# Altium PCB 48V to BOB.PcbDoc
Units mm, origin at the board's own origin, x right, y up, seen from the top; angles counter-clockwise.
Board outline 50.79 x 27.94 mm, 4 copper layers (Top Side, Inner Layer 1, Inner Layer 2, Bottom Side), stack 1.59 mm thick; 11 components, 20 nets, 54 pads, 11 vias.
Unrouted connection lines stored in the file: 2.
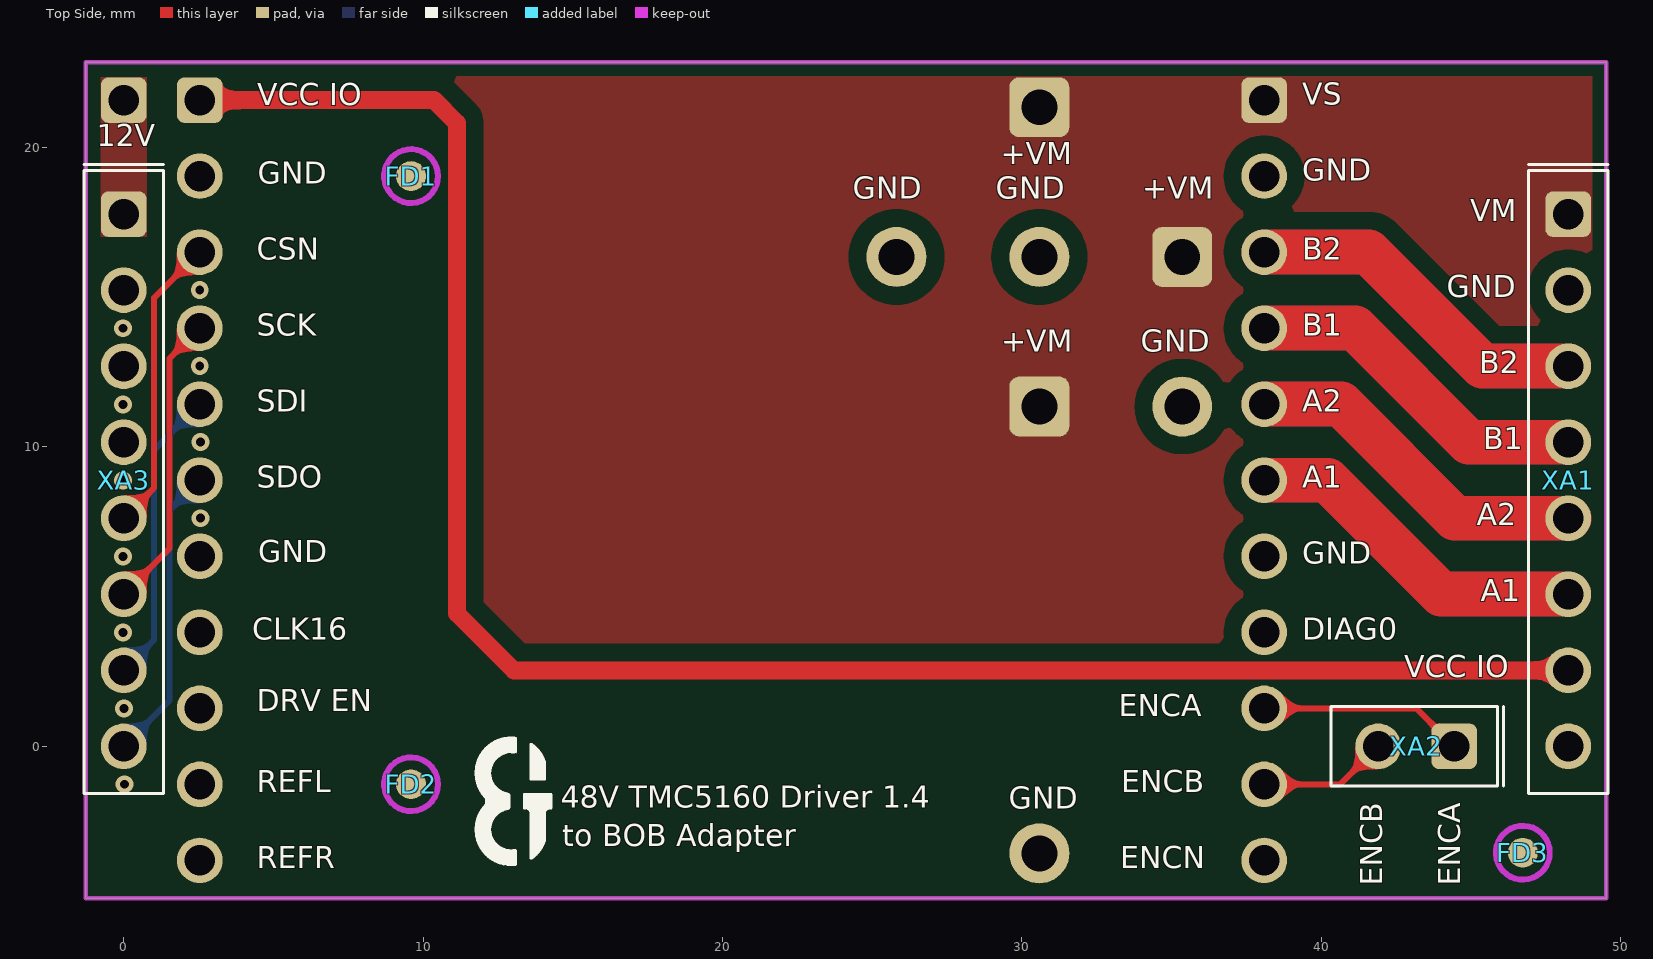
[diagram p0: Top Side view]
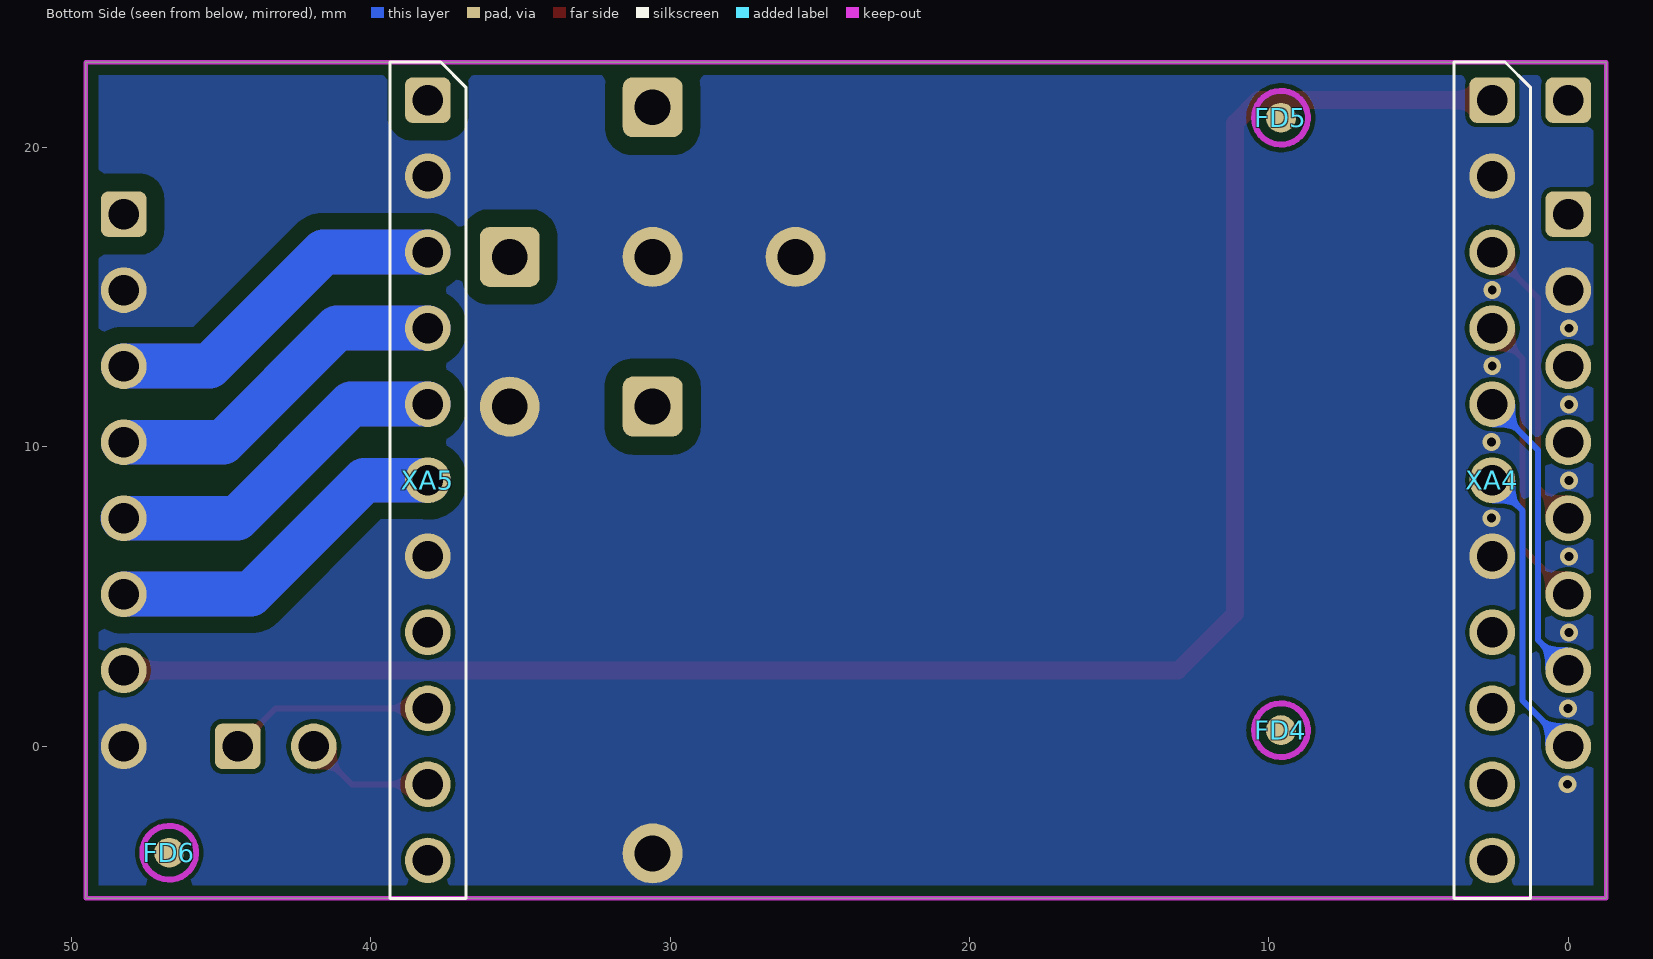
[diagram p1: Bottom Side view, seen from below]
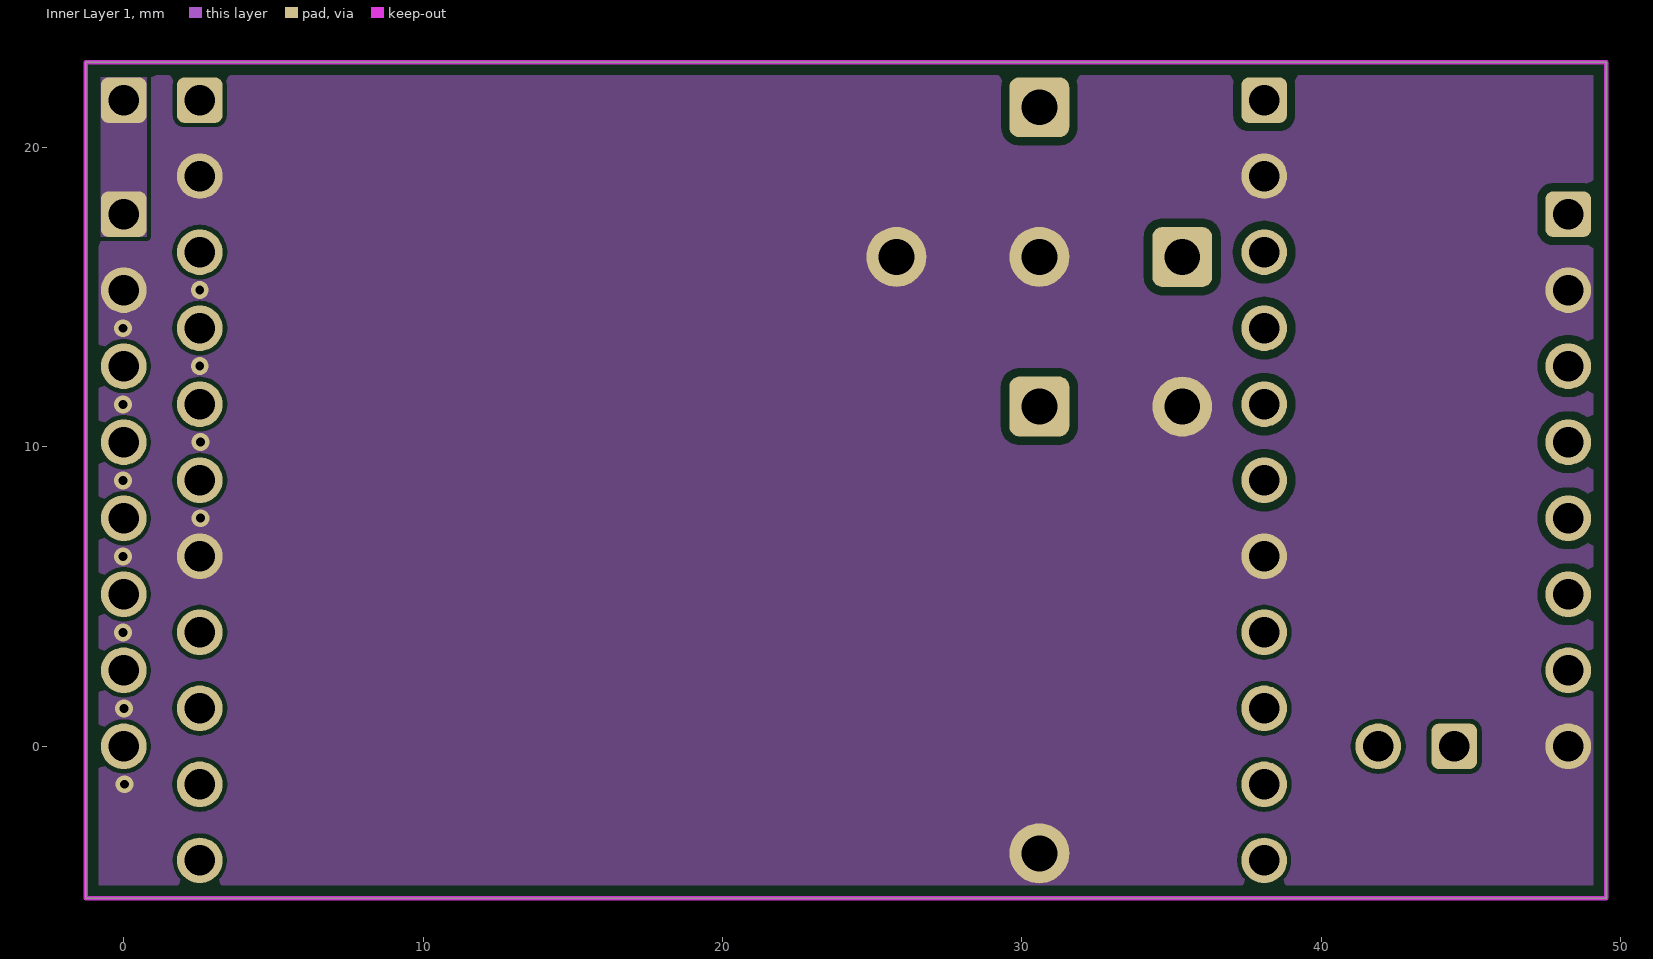
[diagram p2: Inner Layer 1]
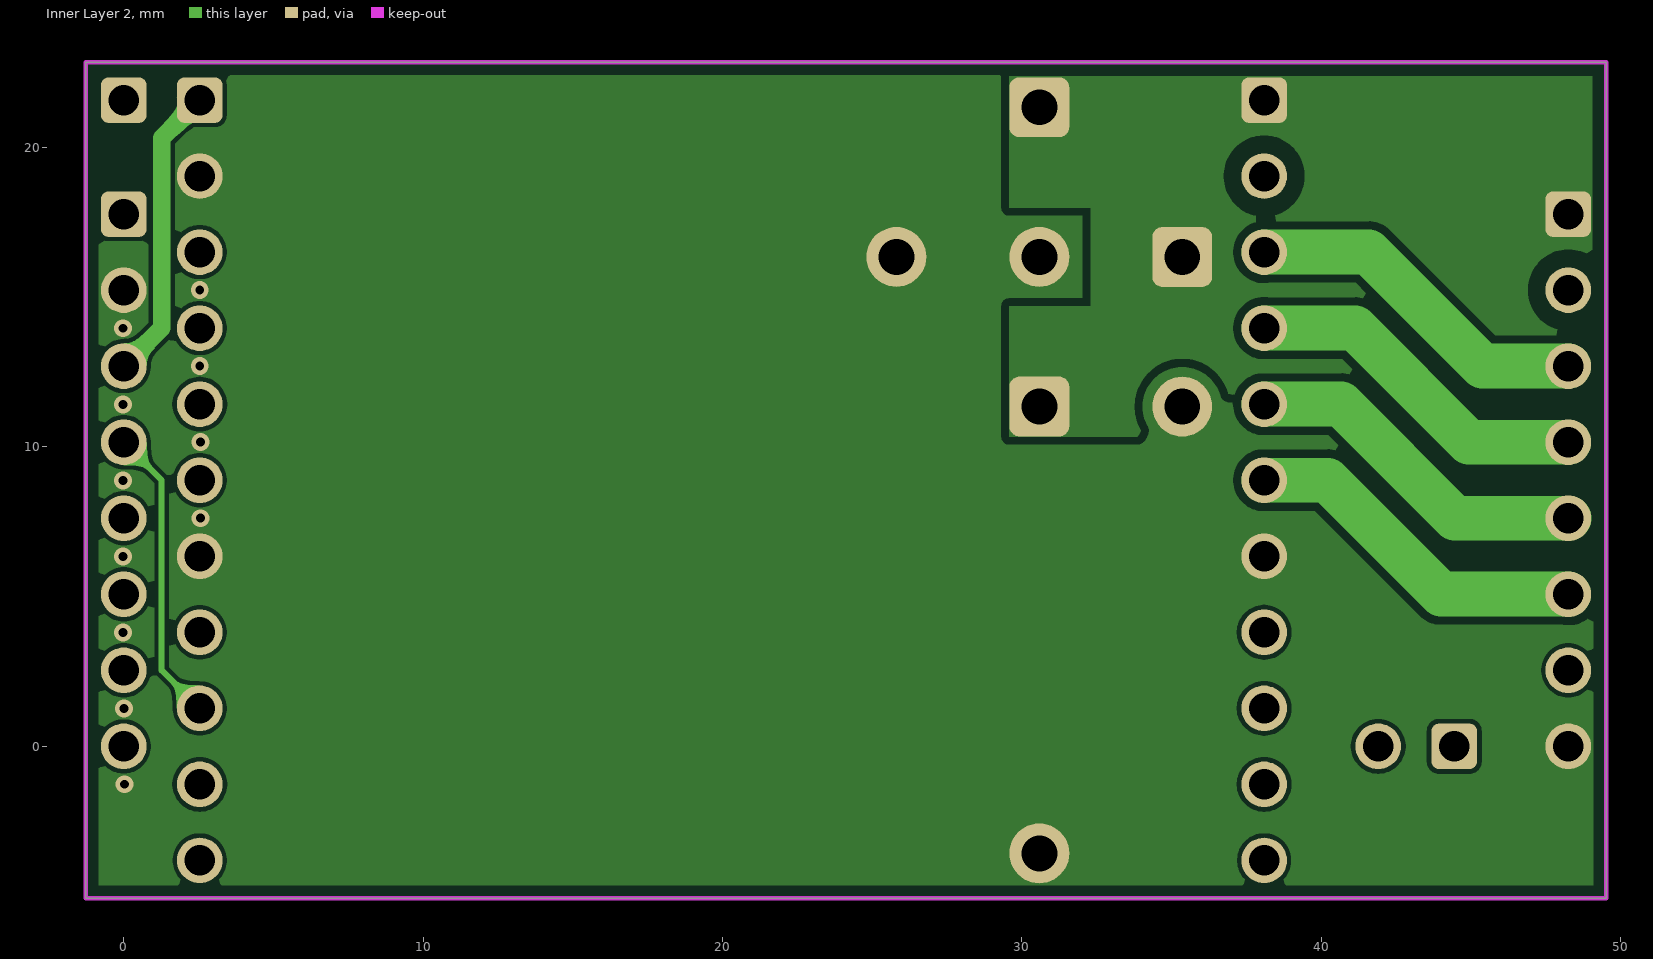
[diagram p3: Inner Layer 2]
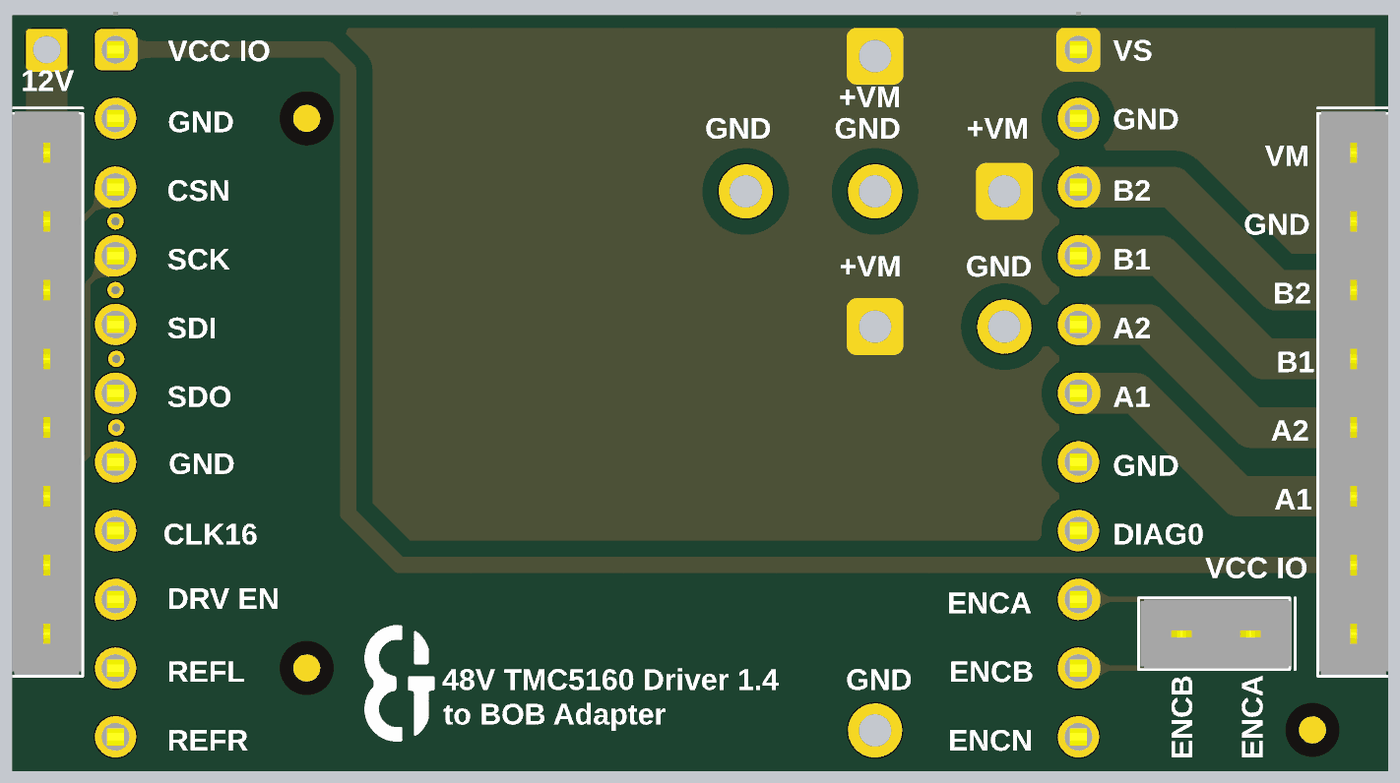
[diagram p4: 3D render of the assembled board from above, using the file's embedded part models]

## Layer stack, top to bottom
Top Solder: solder mask 0.015, WE-SM-0001, Dk 3.5
Top Side: signal copper 0.035
Dielectric 1: prepreg 0.37, WE-PP-0013, Dk 4.5
Inner Layer 1: signal copper 0.035
Core 1: core 0.71, WE-CO-0014, Dk 4.7
Inner Layer 2: signal copper 0.035
Dielectric 2: prepreg 0.37, WE-PP-0013, Dk 4.5
Bottom Side: signal copper 0.035
Bottom Solder: solder mask 0.015, WE-SM-0001, Dk 3.5

## Board outline
-1.264,-5.08 -1.264,22.86 49.53,22.86 49.53,-5.08

## Design rules (kind name [scope] priority, off if disabled: settings)
AssemblyTestpoint [All] p1: testpointundercomponent=TRUE minsize=0.8 maxsize=2.5 preferedsize=1 minholesize=0 maxholesize=0.5 preferedholesize=0.3 testpointgrid=0.025 usegrid=TRUE gridtolerance=0 allowsidetop=TRUE allowsidebottom=TRUE minspacing=2.5 compbodyclearance=0.3
BoardOutlineClearance BoardOutlineClearance_SilkTop [OnTopSilkscreen] p1: gap=0.2 ignorepadtopadclearanceinfootprint=FALSE
BoardOutlineClearance [not (OnBottomSilkscreen or OnTopSilkscreen)] p2: gap=0.425 ignorepadtopadclearanceinfootprint=FALSE
Clearance "48V and Motor Internal" [(InNetClass('48V') or InNetClass('Motor')) vs (OnLayer('Inner Layer 1') or OnLayer('Inner Layer 2'))] p1: gap=0.28 ignorepadtopadclearanceinfootprint=FALSE // for 48V, + 0.1mm marging , PD1, According IEC 60664-1:2020 Table F.5
Clearance "48V and Motor to BoardEdge" [(InNetClass('48V') or InNetClass('Motor')) vs IsKeepOut] p2: gap=0.4 ignorepadtopadclearanceinfootprint=FALSE // half Clearance for 48V+ 0.1mm marging , PD2, According IEC 60664-1:2020 Table F.5
Clearance 48V [InNetClass('48V')] p3: gap=0.6 ignorepadtopadclearanceinfootprint=FALSE // for 48V, PD2, According IEC 60664-1:2020 Table F.5
Clearance MotorPhase [InNetClass('Motor')] p4: gap=0.56 ignorepadtopadclearanceinfootprint=FALSE // Motor Phase Voltages to all other (48/1.41=34V), PD2, According IEC 60664-1:2020 Table F.5
Clearance General [All] p5: gap=0.15 ignorepadtopadclearanceinfootprint=FALSE except(0.3: Arc-Hole Track-Hole SMDPad-Hole THPad-Hole Via-Hole Fill-Hole Poly-Hole Region-Hole Text-Hole)
Clearance BoardEdge [All vs OnLayer('Keep-Out Layer')] p6: gap=0.5 ignorepadtopadclearanceinfootprint=FALSE // Clearance Copper to Board Edge
ComponentClearance TP2OTHERS_10_bot [HasFootprint('13_TP_0-8mm') OR HasFootprint('13_TP_0-8_0-3mm') vs (ObjectKind = 'Component') And OnBottomLayer And (AsMM(Height) > 10)] p1: gap=5 collisioncheckmode=3 verticalgap=50 showdistances=FALSE // Für Testpunkte auf Bottom, für Top Rule ändern (beide gehen nicht wegen TH Testpunkt)
ComponentClearance TP2OTHERS_3.5_bot [HasFootprint('13_TP_0-8mm') OR HasFootprint('13_TP_0-8_0-3mm') vs (ObjectKind = 'Component') And OnBottomLayer And (AsMM(Height) > 3.5)] p2: gap=2.5 collisioncheckmode=3 verticalgap=50 showdistances=FALSE // Für Testpunkte auf Bottom, für Top Rule ändern (beide gehen nicht wegen TH Testpunkt)
ComponentClearance TP2OTHERS_0.3_bot [HasFootprint('13_TP_0-8mm') OR HasFootprint('13_TP_0-8_0-3mm') vs (ObjectKind = 'Component') And OnBottomLayer And (AsMM(Height) < 3.5)] p3: gap=0.3 collisioncheckmode=3 verticalgap=50 showdistances=FALSE // Für Testpunkte auf Bottom, für Top Rule ändern (beide gehen nicht wegen TH Testpunkt)
ComponentClearance "PCB Header" [InComponent('XA1') vs InComponent('XA2')] p4: gap=0 collisioncheckmode=3 verticalgap=0.4 showdistances=FALSE
ComponentClearance Minimal [All] p5: gap=0.4 collisioncheckmode=3 verticalgap=0.4 showdistances=FALSE // Kann bei feinen SMD Strukturen von 0.4 auf 0.25mm reduziert werden
Creepage "Creepage VM" [InNetClass('48V') and OnBottomLayer] p1: checkdistance=0.6 ignoreinternallayers=FALSE // VM to all other, According IEC 60664-1:2020 Table F.5
Creepage "Creepage MotorVoltagetoMotorVoltage" [InNetClass('Motor') and OnBottomLayer] p2: checkdistance=0.56 // According IEC 60664-1:2020 Table F.5
FabricationTestpoint [All] p1: side=3 testpointundercomponent=TRUE minsize=0.8 maxsize=2.5 preferedsize=1 minholesize=0 maxholesize=0.5 preferedholesize=0.3 testpointgrid=0.025 allowsidetop=TRUE allowsidebottom=TRUE usegrid=TRUE gridtolerance=0 minspacing=2.5 compbodyclearance=0.3 boardedgeclearance=0.5
Height "Height BOTTOM" [OnLayer('Bottom Layer')] p1: minheight=0 maxheight=10 prefheight=10
Height "Height TOP" [OnLayer('Top Layer')] p2: minheight=0 maxheight=100 prefheight=100
HoleSize [All] p1: absolutevalues=TRUE maxlimit=100 minlimit=0.3 maxpercent=80.000 minpercent=20.000
HoleToHoleClearance [All] p1: gap=0.2 allowstackedmicrovias=TRUE
MinimumAnnularRing [IsVia  Or PadIsPlated] p1: minimumring=0.15
MinimumSolderMaskSliver [All vs Not IsTrack] p1: minsoldermaskwidth=0.075
PermittedLayers [All] p1: toplayerpermitted=TRUE bottomlayerpermitted=TRUE
PlaneClearance [All] p1: clearance=0.5
PlaneConnect [All] p1: planeconnectstyle=Relief reliefexpansion=0.5 reliefentries=4 reliefconductorwidth=0.2 reliefairgap=0.2
PolygonConnect "PolygonConnect 0603" [HasFootprint('CAPC1608X90X40NL10T20') or HasFootprint('RESC1608X55X25NL10T15')  or HasFootprint('DIOC1608X55X25NL10T15') vs InNet('GND')] p1: connectstyle=Relief reliefconductorwidth=0.2 reliefentries=4 polygonreliefangle="90 Angle" airgapwidth=0.2
PolygonConnect "PolygonConnect 0603_EMI_MOTOR" [HasFootprint('CAPC1608X90X40NL10T20') vs InNet('BMA1') OR InNet('BMA2') OR InNet('BMB1') OR InNet('BMB2')] p2: connectstyle=Relief reliefconductorwidth=0.2 reliefentries=4 polygonreliefangle="90 Angle" airgapwidth=0.2
PolygonConnect PolygonConnect_VIA [(ObjectKind = 'Via')] p3: connectstyle=Direct reliefconductorwidth=0.254 reliefentries=4 polygonreliefangle="90 Angle" airgapwidth=0.254
PolygonConnect [All] p4: connectstyle=Direct reliefconductorwidth=0.5 reliefentries=4 polygonreliefangle="45 Angle" airgapwidth=0.254
ReturnPath [InNetClass('SPI')] p1: impedanceprofileid={5675E06A-8E76-43C0-A3DD-5DD58765DDAF} _gaplimit=0 _useantipads=TRUE
RoutingCorners [All] p1: cornerstyle=45-Degree minsetback=1 maxsetback=25
RoutingVias [All] p1: holewidth=0.3 width=0.6 viastyle="Through Hole" minholewidth=0.3 minwidth=0.6 maxholewidth=1.5 maxwidth=2
SMDEntry [All] p1 off: side=TRUE corner=TRUE anyangle=FALSE
SMDNeckDown [All] p1 off: percent=50.000
SMDToCorner [All] p1 off: distance=39370
SMDToPlane [All] p1 off: distance=0
SilkToSilkClearance [All] p1: silktosilkclearance=0.15
SilkToSolderMaskClearance SilkToSolderMaskClearancePAD [IsPad] p1: minsilkscreentomaskgap=0.15 clearancetoexposedcopper=TRUE
SilkToSolderMaskClearance SilkToSolderMaskClearanceMASK [IsPad] p2: minsilkscreentomaskgap=0.1 clearancetoexposedcopper=FALSE
SolderMaskExpansion SolderMaskExpansion_VIA [IsVia] p1: expansion=0.05 istentingtop=FALSE
SolderMaskExpansion SolderMaskExpansion_GENERAL [All] p2: expansion=0.05 istentingtop=FALSE
UnRoutedNet [All] p1: checkbadconnections=TRUE
ViasUnderSMD [All] p1: allowed=FALSE
Width Width_MotorPower [InNet('BMA1') or InNet('BMA2') or InNet('BMB1') or InNet('BMB2')] p1 off: maxlimit=3 minlimit=1 preferedwidth=2
Width Width_50R_SE [InNetClass('SPI')] p2 off: maxlimit=0.559 minlimit=0.254 preferedwidth=0.559 toplayer_minwidth=0.559 bottomlayer_minwidth=0.559 impedanceprofiledriven=TRUE impedanceprofileid={5675E06A-8E76-43C0-A3DD-5DD58765DDAF} impedanceprofilevalue=50.000000 minimp=50.000000 maximp=50.000000 favimp=50.000000
Width [All] p3: maxlimit=5 minlimit=0.2 preferedwidth=0.3
17 further rules are at their usual default settings.

## Classes and differential pairs
net class 48V: +VM
net class SPI: CSN DRV_ENN SCK SDI SDO
net class Motor: BMA1 BMA2 BMB1 BMB2

## Components (designator, comment, footprint, x,y, rotation, side; value= is the part's Value field where it differs from the comment)
FD1 "Fiducial Mark" Fiducial 9.6,19.05 r0 top
FD2 "Fiducial Mark" Fiducial 9.6,-1.267 r0 top
FD3 "Fiducial Mark" Fiducial 46.741,-3.555 r0 top
FD4 "Fiducial Mark" Fiducial 9.6,0.539 r0 bottom
FD5 "Fiducial Mark" Fiducial 9.6,21 r0 bottom
FD6 "Fiducial Mark" Fiducial 46.741,-3.555 r0 bottom
XA1 "ESW-108-12-T-S" SAMTEC_ESW-108-12-T-S 48.26,17.78 r270 top
XA2 "ESW-102-12-T-S" SAMTEC_ESW-102-12-G-S 44.45,0 r180 top
XA3 "ESW-108-12-T-S" SAMTEC_ESW-108-12-T-S 0,17.78 r270 top
XA4 "TSW11107GS" SAMTEC_TSW-111-07-G-S 2.54,21.59 r270 bottom
XA5 "TSW11107GS" SAMTEC_TSW-111-07-G-S 38.1,21.59 r270 bottom

## Footprints (in the part's own frame and the unit in brackets; to place one, negate y for a bottom-side part, rotate by r counter-clockwise, add the part's x,y. Pads: shape width x height; smd on the part's side, far side on the other; paste and mask are expansions set on the pad)
Fiducial [mm] "1mm Dot diameter, 2mm Ring Diameter"
  round 1 smd paste-99 mask+0.5: FD(0,0)
  Top Side keep-out circle w0.2: c0,0 r0.9
SAMTEC_ESW-102-12-G-S [mil] "2.54mm Pitch PCB Socket, Single Row, Vertical, 2 Circuits"
  rrect33% 60x60 hole 40: 1(0,0)
  round 60 hole 40: 2(100,0)
  silkscreen extent -65,-52 162,52, body extent -60,-50 160,50, height 436
SAMTEC_ESW-108-12-T-S [mil] "2.54mm Pitch PCB Socket Single Row, Vertical, 8 Circuits"
  rrect33% 60x60 hole 40: 1(0,0)
  round 60 hole 40: 2(100,0) 3(200,0) 4(300,0) 5(400,0) 6(500,0) 7(600,0) 8(700,0)
  silkscreen extent -65,-52 762,52, body extent -60,-50 760,50, height 436
SAMTEC_TSW-111-07-G-S [mil] "2.54mm Pitch PCB Header, Single Row, Vertical, 11 Circuits"
  rrect33% 60x60 hole 40: 1(0,0)
  round 60 hole 40: 2(100,0) 3(200,0) 4(300,0) 5(400,0) 6(500,0) 7(600,0) 8(700,0) 9(800,0) 10(900,0) 11(1000,0)
  silkscreen extent -50,-50 1050,50, body extent -55,-50 1050,50, height 330

## Part data
FD1 FD2 FD3 FD4 FD5 FD6: library part CMP-013-00002-0, "Fiducial mark.  There is nothing to buy or mount.", Manufacturer=N/A, ClassName=FiducialMark, MountType=N/A, PackageReference=Fiducial, PartNumber=N/A, PartValue="Fiducial Mark"
XA1 XA3: library part CMP-008-00005-0, "Con Socket PCB SMD 8Pos 2.54mm", Current=3A, Manufacturer 1=Samtec, Manufacturer Part Number 1=TSW-108-07-G-S, Part Number=13-0359, Voltage=250V, AECQ=False, Author=Lerch, ComponentLink1Description=Datasheet, ComponentLink1URL=https://suddendocs.samtec.com/catalog_english/esw_th.pdf, Distributor=Mouser, LatestRevision Note=Initial, Order Number=200-ESW10812TS, Part Description="8 Pin PCB Socket Strips, 2.54mm (0.100\") pitch", PartValue=ESW-108-12-T-S, RoHS=True, System=Connector, Type1=CON, Type2=2.54mm
XA2: library part CMP-008-00004-0, "Con Socket PCB SMD 2Pos 2.54mm", Current=3A, Manufacturer 1=Samtec, Voltage=250V, AECQ=False, Author=Lerch, ComponentLink1Description=Datasheet, ComponentLink1URL=https://suddendocs.samtec.com/catalog_english/esw_th.pdf, Distributor=Mouser, LatestRevision Note=Initial, Manufacturer Part Number 1=ESW-102-12-T-S, Order Number=200-ESW10212TS, Part Description="2 Pin, PCB Socket Strips, 2.54mm (0.100\") pitch", PartValue=ESW-102-12-T-S, RoHS=True, System=Connector, Type1=CON, Type2=2.54mm
XA4 XA5: library part CMP-008-00003-0, "Con Header PCB SMD 11Pos 2.54mm", Current=3A, Manufacturer 1=Samtec, Manufacturer Part Number 1=TSW-111-07-G-S, Voltage=250V, AECQ=False, Author=Lerch, ComponentLink1Description=Datasheet, ComponentLink1URL=https://suddendocs.samtec.com/catalog_english/tsw_th.pdf, Distributor=Mouser, LatestRevision Note=Initial, Order Number=200-TSW11107GS, Part Description="11 Pin PCB Header Strips, 2.54mm (0.100\") pitch", PartValue=TSW11107GS, RoHS=True, System=Connector, Type1=CON, Type2=2.54mm

## Free pads (board coordinates)
  rrect33% 1.524x1.524 hole 1.016: 3(0,21.59)
  rrect33% 2x2 hole 1.2: 3(30.589,11.35) 3(30.589,21.35) 3(35.364,16.35)
  round 2 hole 1.2: 4(25.814,16.35) 4(30.589,-3.575) 4(30.589,16.35) 4(35.364,11.35)

## Via types
v1: diameter 0.6, hole 0.3, Top Side to Bottom Side, 9 vias
v2: diameter 0.6/0.6/0.6/0.6 (per signal layer), hole 0.3, Top Side to Bottom Side, 2 vias

## Nets (pads, with @x,y where several pads share a name; then routed paths per layer and width w, separated by ;. In a path a pad name is that pad's centre, name@x,y a point inside that pad or via, vN(x,y) a via of type N, cw(c..) or ccw(c..) an arc to the next point about the centre after c; other vN are vias at no path point)
+12V: pad.3@0,21.59 XA3.1
+VM: pad.3@30.589,11.35 pad.3@30.589,21.35 pad.3@35.364,16.35 XA1.1 XA5.1
BMA1: XA1.6 XA5.6 | length 35.2
  Top Side w1.5: XA5.6 40.21,8.89 44.015,5.085 48.26,5.085 XA1.6@48.265,5.08
  Inner Layer 2 w1.5: XA5.6 40.21,8.89 44.015,5.085 48.26,5.085 XA1.6@48.265,5.08
  Bottom Side w1.5: XA5.6 40.21,8.89 44.015,5.085 48.26,5.085 XA1.6@48.265,5.08
BMA2: XA1.5 XA5.5 | length 35.3
  Top Side w1.5: XA5.5 40.67,11.43 44.48,7.62 XA1.5@48.284,7.62
  Inner Layer 2 w1.5: XA5.5 40.67,11.43 44.48,7.62 XA1.5@48.284,7.62
  Bottom Side w1.5: XA5.5 40.67,11.43 44.48,7.62 XA1.5@48.284,7.62
BMB1: XA1.4 XA5.4 | length 35.2
  Top Side w1.5: XA5.4 41.13,13.97 44.94,10.16 XA1.4@48.272,10.16
  Inner Layer 2 w1.5: XA5.4 41.13,13.97 44.94,10.16 XA1.4@48.272,10.16
  Bottom Side w1.5: XA5.4 41.13,13.97 44.94,10.16 XA1.4@48.272,10.16
BMB2: XA1.3 XA5.3 | length 35.2
  Top Side w1.5: XA5.3 41.59,16.51 45.4,12.7 XA1.3@48.272,12.7
  Inner Layer 2 w1.5: XA5.3 41.59,16.51 45.4,12.7 XA1.3@48.272,12.7
  Bottom Side w1.5: XA5.3 41.59,16.51 45.4,12.7 XA1.3@48.272,12.7
CLK16: XA4.8
CSN: XA3.5 XA4.3 | length 9.9
  Top Side w0.2: XA3.5 1.016,8.636 1.016,14.986 XA4.3
DIAG0: XA5.8
DRV_ENN: XA3.4 XA4.9 | length 9.9
  Inner Layer 2 w0.2: XA3.4 1.27,8.89 1.27,2.54 XA4.9
ENCA: XA2.1 XA5.9 | length 6.9
  Top Side w0.2: XA5.9 43.18,1.27 XA2.1
ENCB: XA2.2 XA5.10 | length 4.3
  Top Side w0.2: XA5.10 40.64,-1.27 XA2.2
ENCN: XA5.11
GND: pad.4 XA1.2 XA1.8 XA3.2 XA4.2 XA4.7 XA5.2 XA5.7
  other v1: 0.019,-1.267 0.006,1.267 -0.019,3.807 2.565,7.62 -0.019,8.887 2.565,10.16 -0.019,11.427 2.54,12.7 -0.019,13.967
  other v2: -0.019,6.347 2.54,15.24
REFH: XA4.11
REFL: XA4.10
SCK: XA3.6 XA4.4 | length 9.9
  Top Side w0.2: XA3.6 1.524,6.604 1.524,12.954 XA4.4
SDI: XA3.7 XA4.5 | length 9.9
  Bottom Side w0.2: XA3.7 1.016,3.556 1.016,9.906 XA4.5
SDO: XA3.8 XA4.6 | length 9.9
  Bottom Side w0.2: XA3.8 1.524,1.524 1.524,7.874 XA4.6
VCC_IO: XA1.7 XA3.3 XA4.1 | length 73.2
  Top Side w0.6: XA4.1 10.366,21.59 11.127,20.829 11.127,4.444 13.031,2.54 XA1.7
  Inner Layer 2 w0.6: XA3.3 1.27,13.97 1.27,20.32 XA4.1
pads on no net: FD1.FD FD2.FD FD3.FD FD4.FD FD5.FD FD6.FD

## Polygon pours and split planes (outlines as drawn)
GND on Inner Layer 1 "GND_L02_P077" (solid, remove dead copper, pour order 77): -1.264,-5.08 -1.264,22.86 49.53,22.86 49.53,-5.08
+12V on Inner Layer 1 "+12V_L02_P076" (solid, remove dead copper, pour order 76): -0.762,17.025 -0.762,22.352 0.762,22.352 0.762,17.025
+VM on Top Side "+VM_L01_P075" (solid, remove dead copper, pour order 75): 3.81,-5.08 3.81,22.86 49.53,22.86 49.53,-5.08
+12V on Top Side "+12V_L01_P074" (solid, remove dead copper, pour order 74): -0.762,17.025 -0.762,22.352 0.762,22.352 0.762,17.025
+VM on Inner Layer 2 "+VM_L03_P078" (solid, remove dead copper, pour order 78): 49.53,10.35 49.53,22.86 29.589,22.86 29.589,18 32.3,18 32.3,14.7 29.589,14.7 29.589,10.35
GND on Inner Layer 2 "GND_L03_P079" (solid, remove dead copper, pour order 79): -1.264,-5.08 -1.264,22.86 32.3,22.86 32.3,13 49.53,13 49.53,-5.08
GND on Bottom Side "GND_L04_P080" (solid, remove dead copper, pour order 80): -1.264,-5.08 -1.264,22.86 49.53,22.86 49.53,-5.08

## Keep-outs
Keep-Out Layer:
  the board outline again, w0.15

## Other copper
Top Side:
  text ".LAYER_NAME" at -39.984,-75.771 h5
  text ".GTL" at 18.016,-75.771 h5
Inner Layer 1:
  text ".LAYER_NAME" at -39.984,-75.771 h5
  text ".G1" at 18.016,-75.771 h5
Inner Layer 2:
  text ".LAYER_NAME" at -39.984,-75.771 h5
  text ".G2" at 18.016,-75.771 h5
Bottom Side:
  text ".LAYER_NAME" at -39.984,-75.771 h5
  text ".GBL" at 18.016,-75.771 h5

## Silkscreen, mask and mechanical layers (free items; w line width, h text height)
Top Overlay:
  drawing of 3 lines, arcs and shapes, not listed
  text "VCC IO" at 4.466,21.167 h1.25
  text "VS" at 39.371,21.184 h1.25
  text "12V" at -0.9,19.8 h1.25
  text "+VM" at 29.3,19.2 h1.25
  text "GND" at 39.37,18.644 h1.25
  text "GND" at 4.47,18.542 h1.25
  text "GND" at 24.36,18.039 h1.25
  text "GND" at 29.135,18.039 h1.25
  text "+VM" at 34.019,18.039 h1.25
  text "VM" at 44.982,17.292 h1.25
  text "CSN" at 4.445,16.002 h1.25
  text "B2" at 39.37,16.002 h1.25
  text "GND" at 44.204,14.751 h1.25
  text "SCK" at 4.445,13.462 h1.25
  text "B1" at 39.37,13.462 h1.25
  text "+VM" at 29.319,12.939 h1.25
  text "GND" at 33.985,12.939 h1.25
  text "B2" at 45.287,12.211 h1.25
  text "SDI" at 4.445,10.922 h1.25
  text "A2" at 39.37,10.922 h1.25
  text "B1" at 45.412,9.671 h1.25
  text "SDO" at 4.445,8.382 h1.25
  text "A1" at 39.37,8.382 h1.25
  text "A2" at 45.205,7.131 h1.25
  text "GND" at 4.5,5.906 h1.25
  text "GND" at 39.37,5.842 h1.25
  text "A1" at 45.331,4.591 h1.25
  text "CLK16" at 4.3,3.302 h1.25
  text "DIAG0" at 39.37,3.302 h1.25
  text "VCC IO" at 42.775,2.056 h1.25
  text "DRV EN" at 4.445,0.921 h1.25
  text "ENCA" at 33.25,0.762 h1.25
  text "REFL" at 4.445,-1.778 h1.25
  text "ENCB" at 33.324,-1.778 h1.25
  text "48V TMC5160 Driver 1.4" at 14.605,-2.304 h1.25
  text "GND" at 29.561,-2.335 h1.25
  text "to BOB Adapter" at 14.643,-3.584 h1.25
  text "REFR" at 4.445,-4.318 h1.25
  text "ENCN" at 33.289,-4.318 h1.25
  text "ENCB" at 42.3,-4.65 h1.25 r90
  text "ENCA" at 44.9,-4.65 h1.25 r90
Bottom Solder:
  text "'.Artikel_Stamm'-'.Typ_PB'" at 31.5,8.75 h1.5
  text ".VersionControl_RevNumber" at 29.235,7.535 h1
  text "SVN:" at 31.5,7.535 h1
M1 Board Shape:
  text ".LAYER_NAME" at -39.984,-75.771 h5
  text ".GM1" at 18.016,-75.771 h5
M2 Board Dimensions:
  text ".LAYER_NAME" at -39.984,-75.771 h5
  text ".GM2" at 18.016,-75.771 h5
M3 Bord Instructions:
  text ".LAYER_NAME" at -39.984,-75.771 h5
  text ".GM3" at 18.016,-75.771 h5
M4 Fabrication Info:
  lines w0.25: -58.166,115 34.834,115 ; -58,115 -58,198 35,198 35,115 ; -58,147 35,147 ; -58,152 35,152 ; -58,171 35,171 ; -57.834,123 35,123 ; -57.834,128 35,128 ; -57.5,35 -47.037,35 -20.355,35 -5.423,35 6.448,35 ; -57.5,40 -47.037,40 -20.355,40 -5.423,40 6.448,40 ; -57.5,45 -47.037,45 -20.355,45 -5.423,45 6.448,45 ; -57.5,50 -47.037,50 -20.355,50 -5.423,50 6.448,50 ; -57.5,55 -47.037,55 -20.355,55 -5.423,55 6.448,55 ; -57.5,60 -47.037,60 -20.355,60 -5.423,60 6.448,60 ; -57.5,65 -47.037,65 -20.355,65 -5.423,65 6.448,65 ; -57.5,70 -47.037,70 -20.355,70 -5.423,70 6.448,70 ; -57.5,75 -47.037,75 -20.355,75 -5.423,75 6.448,75 ; -57.5,80 -47.037,80 -20.355,80 -5.423,80 6.448,80 ; -57.5,85 -47.037,85 -20.355,85 -5.423,85 6.448,85 ; -57.5,90 -47.037,90 -20.355,90 -5.423,90 6.448,90 ; -57.5,95 6.448,95 ; -47.037,100 -47.037,30 ; -20.355,100 -20.355,30 ; -17,179 -11,179 ; -17,181.5 -11,181.5 ; -17,184.5 -11,184.5 ; -17,187.5 -11,187.5 ; -17,190.5 -11,190.5 ; -17,193.5 -11,193.5 ; -5.423,100 -5.423,30 ; -47.037,30 -57.5,30 -57.5,100 6.448,100 6.448,30 -5.423,30 ; -47.037,30 -20.355,30 ; -20.355,30 -5.423,30
  text "DESIGN INFORMATION FOR PCB FABRICATION" at -57.5,200 h3.5
  text "MIN. TRACK WIDTH:" at -56,194 h2.5
  text "0.20" at -17,194 h2.5
  text "mm" at -9,194 h2.5
  text "MIN. CLEARANCE:" at -56,191 h2.5
  text "0.15" at -17,191 h2.5
  text "mm" at -9,191 h2.5
  text "MIN. VIA PAD SIZE:" at -56,188 h2.5
  text "0.30" at -17,188 h2.5
  text "mm" at -9,188 h2.5
  text "MIN. ANNULAR RING:" at -56,185 h2.5
  text "0.30" at -17,185 h2.5
  text "mm" at -9,185 h2.5
  text "HOLE SIZE TOLERANCE:" at -56,182 h2.5
  text "0.075" at -17,182 h2.5
  text "mm" at -9,182 h2.5
  text "(UNLESS OTHERWISE SPECIFIED)" at -4,182 h2.5
  text "OUTLINE TOLERANCE:" at -56,179 h2.5
  text "0.15" at -17,179 h2.5
  text "mm" at -9,179 h2.5
  text "FINAL COPPER THICKNESS:" at -56,176 h2.5
  text "PER IPC-6012 CLASS 2" at -17,176 h2.5
  text "PTH COPPER THICKNESS:" at -56,173 h2.5
  text "PER IPC-6012 CLASS 2" at -17,173 h2.5
  text "MATERIAL:" at -56,167 h2.5
  text "FR4, TG150, UL94 V0" at -17,167 h2.5
  text "ROHS,  HALOGEN FREE" at -17,164 h2.5
  text "THICKNESS:" at -56,160 h2.5
  text "SEE LAYER STACK" at -17,160 h2.5
  text "TOLERANCE:" at -54,157 h2.5
  text "PER IPC-6012 TYPE 3 CLASS 2" at -17,157 h2.5
  text "BOW / TWIST:" at -54,154 h2.5
  text "PER IPC-6012 TYPE 3 CLASS 2" at -17,154 h2.5
  text "SURFACE FINISH:" at -56,149 h2.5
  text "ENIG" at -17,149 h2.5
  text "BOARD FINISH:" at -56,144 h2.5
  text "SOLDER RESIST COLOR:" at -54,141 h2.5
  text "GREEN" at -17,141 h2.5
  text "SILKSCREEN TOP:" at -54,138 h2.5
  text "YES" at -17,138 h2.5
  text "SILKSCREEN BOTTOM:" at -54,135 h2.5
  text "NO" at -17,135 h2.5
  text "SILKSCREEN COLOR:" at -54,132 h2.5
  text "WHITE" at -17,132 h2.5
  text "COATING:" at -54,129 h2.5
  text "NO" at -17,129 h2.5
  text "OUTLINE FINISH:" at -56.166,125 h2.5
  text "MILLED" at -17.166,125 h2.5
  text "PCB INSPECTION:" at -56.166,120 h2.5
  text "PER IPC-A-600 CLASS 2" at -17.166,120 h2.5
  text "BARE BORD ELECTRIC TEST:" at -56.166,117 h2.5
  text "YES" at -17.166,117 h2.5
  text "LAYER STACK" at -57.5,102.5 h3.5
  text "Layer" at -55,96.25 h2.5
  text "Name" at -44.537,96.25 h2.5
  text "Thickness" at -17.855,96.25 h2.5
  text "Gerber" at -2.923,96.25 h2.5
  text "Top Overlay" at -44.537,91.25 h2.5
  text "GTO" at -2.923,91.25 h2.5
  text "Top Solder" at -44.537,86.25 h2.5
  text "0.015mm" at -17.855,86.25 h2.5
  text "GTS" at -2.923,86.25 h2.5
  text "Top Surface Finish" at -44.537,81.25 h2.5
  text "0.004mm" at -17.855,81.25 h2.5
  text "1" at -55,76.25 h2.5
  text "Top Side" at -44.537,76.25 h2.5
  text "0.035mm" at -17.855,76.25 h2.5
  text "GTL" at -2.923,76.25 h2.5
  text "Dielectric 1" at -44.537,71.25 h2.5
  text "0.370mm" at -17.855,71.25 h2.5
  text "2" at -55.002,66.25 h2.5
  text "Inner Layer 1" at -44.537,66.25 h2.5
  text "0.035mm" at -17.855,66.25 h2.5
  text "G1" at -2.923,66.25 h2.5
  text "Core 1" at -44.537,61.25 h2.5
  text "0.710mm" at -17.855,61.25 h2.5
  text "3" at -55,56.25 h2.5
  text "Inner Layer 2" at -44.537,56.25 h2.5
  text "0.035mm" at -17.855,56.25 h2.5
  text "G2" at -2.923,56.25 h2.5
  text "Dielectric 2" at -44.537,51.25 h2.5
  text "0.370mm" at -17.855,51.25 h2.5
  text "4" at -55,46.25 h2.5
  text "Bottom Side" at -44.537,46.25 h2.5
  text "0.035mm" at -17.855,46.25 h2.5
  text "GBL" at -2.923,46.25 h2.5
  text "Bottom Surface Finish" at -44.537,41.25 h2.5
  text "0.004mm" at -17.855,41.25 h2.5
  text "Bottom Solder" at -44.537,36.25 h2.5
  text "0.015mm" at -17.855,36.25 h2.5
  text "GBS" at -2.923,36.25 h2.5
  text "Bottom Overlay" at -44.537,31.25 h2.5
  text "GBO" at -2.923,31.25 h2.5
  text "Total board thickness:" at -55,26.25 h2.5
  text "1.628mm" at -17.855,26.25 h2.5
  text ".LAYER_NAME" at -39.984,-75.771 h5
  text ".GM4" at 18.016,-75.771 h5
M5 Assembly Notes:
  text ".LAYER_NAME" at -39.984,-75.771 h5
  text ".GM5" at 18.016,-75.771 h5
Top Assembly:
  text ".LAYER_NAME" at -39.984,-75.771 h5
  text ".GM6" at 18.016,-75.771 h5
Bottom Assembly:
  text ".LAYER_NAME" at -39.984,-75.771 h5
  text ".GM7" at 18.016,-75.771 h5
Top Body:
  text ".LAYER_NAME" at -39.984,-75.771 h5
  text ".GM8" at 18.016,-75.771 h5
Bottom Body:
  text ".LAYER_NAME" at -39.984,-75.771 h5
  text ".GM9" at 18.016,-75.771 h5
Top Courtyard:
  text ".LAYER_NAME" at -39.984,-75.771 h5
  text ".GM10" at 18.016,-75.771 h5
Bottom Courtyard:
  text ".LAYER_NAME" at -39.984,-75.771 h5
  text ".GM11" at 18.016,-75.771 h5
Top Value:
  text ".LAYER_NAME" at -39.984,-75.771 h5
  text ".GM12" at 18.016,-75.771 h5
Bottom Value:
  text ".LAYER_NAME" at -39.984,-75.771 h5
  text ".GM13" at 18.016,-75.771 h5
M14 Top Silkscreen:
  text ".LAYER_NAME" at -39.984,-75.771 h5
  text ".GM14" at 18.016,-75.771 h5
M15 Bottom Silkscreen:
  text ".LAYER_NAME" at -39.984,-75.771 h5
  text ".GM15" at 18.016,-75.771 h5
M16 Sheet:
  drawing of 68 lines, arcs and shapes, not listed
  text "1" at -40.859,207.925 h2.5
  text "2" at 11.641,207.925 h2.5
  text "3" at 64.141,207.925 h2.5
  text "4" at 116.641,207.925 h2.5
  text "5" at 169.141,207.925 h2.5
  text "6" at 221.641,207.925 h2.5
  text "7" at 274.141,207.925 h2.5
  text "8" at 326.641,207.925 h2.5
  text "A" at -65.089,181.354 h2.5
  text "A" at 349.911,181.354 h2.5
  text "B" at -65.089,136.854 h2.5
  text "B" at 349.911,136.854 h2.5
  text "C" at -65.089,87.354 h2.5
  text "C" at 349.911,87.354 h2.5
  text "D" at -65.089,37.854 h2.5
  text "D" at 349.911,37.854 h2.5
  text "E" at -65.089,-11.646 h2.5
  text "E" at 349.911,-11.646 h2.5
  text "Enabling Innovation Trachsel" at 175.516,-53.764 h2.75
  text "RESPONSIBLE" at 209.266,-54.021 h2.75
  text "DATE" at 237.396,-54.056 h2.75
  text ".ProjectTitle" at 249.213,-57.271 h7.5
  text "Kleinfeldstrasse 20" at 175.516,-57.544 h2.5
  text "ENGINEER:" at 209.516,-59.021 h2.75
  text "R.Lerch" at 225.016,-59.05 h2.75
  text "26.12.21" at 237.396,-59.05 h2.75
  text "F" at -65.089,-61.146 h2.5
  text "F" at 349.911,-61.146 h2.5
  text "2563 Ipsach" at 175.514,-61.745 h2.5
  text "LAYOUT:" at 209.516,-64.046 h2.75
  text "R.Lerch" at 225.016,-64.031 h2.75
  text "26.12.21" at 237.396,-64.031 h2.75
  text "Adapter" at 249.213,-64.306 h7.5
  text "Switzerland" at 175.516,-65.551 h2.5
  text "DOCUMENT NUMBER:" at 294.864,-68.935 h2.5
  text "'.Artikel_Stamm'-'.Typ_PB'.'.Variante_PB'.'.a5_Rev_PB'" at 320,-69 h2.75
  text "ALL ARTWORK VIEWED FROM TOP SIDE" at -60.484,-69.021 h2.5
  text "CHECKED:" at 209.516,-69.021 h2.75
  text "VARIANT:" at 249.265,-69.176 h2.5
  text "LAYER NAME:" at -60.234,-74.021 h2.5
  text "PROPRIETARY AND CONFIDENTIAL" at 164.516,-74.022 h2.5
  text "REVIEWED:" at 209.516,-74.021 h2.75
  text "PROJECT SVN REVISON:" at 249.267,-74.036 h2.25
  text ".Print_Scale" at 323.729,-74.036 h2.25
  text "ALTIUM VERSION:" at 294.864,-74.065 h2.25
  text ".VersionControl_RevNumber" at 274.24,-74.113 h2.25
  text ".Application_BuildNumber" at 313.864,-74.113 h2.25
  text "Millimeter" at 92.966,-78.471 h2
  text ".plot_File_Name" at -39.884,-78.745 h2.5
  text "APPROVED:" at 209.516,-78.771 h2.75
  text "FILENAME:" at 249.265,-78.896 h2.25
  text ".Pcb_File_Name_No_Path" at 263.266,-78.896 h2.25
  text "PRINT DATE:" at 324.016,-78.92 h2.25
  text ".Print_Date" at 337.232,-78.939 h2.25
  text "PLOT NAME:" at -60.234,-79.021 h2.5
  text "1" at -40.859,-84.075 h2.5
  text "2" at 11.641,-84.075 h2.5
  text "3" at 64.141,-84.075 h2.5
  text "4" at 116.641,-84.075 h2.5
  text "5" at 169.141,-84.075 h2.5
  text "6" at 221.641,-84.075 h2.5
  text "7" at 274.141,-84.075 h2.5
  text "8" at 326.641,-84.075 h2.5
  text "THE INFORMATION CONTAINED IN THIS DRAWING IS THE SOLE PROPERTY OF ENABLING INNOVATIONS TECHNOLOGY. ANY REPRODUCTION IN PART OR AS A WHOLE WITHOUT WRITTEN PERMISSION OF  ENABLING INNOVATIONS TECHNOLOGY IS PROHIBITED" at 164.516,-84.521 h1.5
Drill Drawing:
  lines w0.2: 0.476,-13.215 0.821,-13.215 1.166,-13.56 1.512,-13.215 1.857,-13.215 1.512,-12.869 1.857,-12.524 1.512,-12.524 1.166,-12.178 0.821,-12.524 0.476,-12.524 0.821,-12.869 0.476,-13.215 ; 0.476,-9.07 1.857,-9.07 1.166,-10.451 0.476,-9.07 ; 0.476,-7.343 1.857,-7.343 1.857,-5.961 0.476,-5.961 0.476,-7.343
  lines w0.25: -0.761,-14.493 76.301,-14.493 ; -0.761,-5.167 76.301,-5.167 ; 7.221,-17.601 7.221,-2.058 ; 13.785,-17.601 13.785,-2.058 ; 27.482,-17.601 27.482,-2.058 ; 33.673,-17.601 33.673,-2.058 ; 42.683,-17.601 42.683,-2.058 ; 58.338,-17.601 58.338,-2.058 ; 65.722,-17.601 65.722,-2.058 ; -0.761,-17.601 76.301,-17.601 76.301,-2.058 -0.761,-2.058 -0.761,-17.601
  text "Symbol" at 1.104,-4.234 h1.8
  text "Count" at 8.154,-4.234 h1.8
  text "Hole Size" at 14.718,-4.234 h1.8
  text "Plated" at 28.414,-4.234 h1.8
  text "Hole Type" at 34.606,-4.234 h1.8
  text "Drill Layer Pair" at 43.615,-4.234 h1.8
  text "Via/Pad" at 59.271,-4.234 h1.8
  text "Pad Shape" at 66.655,-4.234 h1.8
  text "7" at 8.154,-7.343 h1.5
  text "1.200mm (47.24mil)" at 14.718,-7.343 h1.5
  text "PTH" at 28.414,-7.343 h1.5
  text "Round" at 34.606,-7.343 h1.5
  text "Top Side - Bottom Side" at 43.615,-7.343 h1.5
  text "Pad" at 59.271,-7.343 h1.5
  text "(Mixed)" at 66.655,-7.343 h1.5
  text "11" at 8.154,-10.451 h1.5
  text "0.300mm (11.81mil)" at 14.718,-10.451 h1.5
  text "PTH" at 28.414,-10.451 h1.5
  text "Round" at 34.606,-10.451 h1.5
  text "Top Side - Bottom Side" at 43.615,-10.451 h1.5
  text "Via" at 59.271,-10.451 h1.5
  text "Rounded" at 66.655,-10.451 h1.5
  text "41" at 8.154,-13.56 h1.5
  text "1.016mm (40.00mil)" at 14.718,-13.56 h1.5
  text "PTH" at 28.414,-13.56 h1.5
  text "Round" at 34.606,-13.56 h1.5
  text "Top Side - Bottom Side" at 43.615,-13.56 h1.5
  text "Pad" at 59.271,-13.56 h1.5
  text "(Mixed)" at 66.655,-13.56 h1.5
  text "59 Total" at 8.154,-16.669 h1.5
M17:
  text ".LAYER_NAME" at -39.984,-75.771 h5
  text ".GM17" at 18.016,-75.771 h5
M18 Rigid:
  text ".LAYER_NAME" at -39.984,-75.771 h5
  text ".GM18" at 18.016,-75.771 h5
M19 Flex:
  text ".LAYER_NAME" at -39.984,-75.771 h5
  text ".GM19" at 18.016,-75.771 h5
M20 Bending Lines:
  text ".LAYER_NAME" at -39.984,-75.771 h5
  text ".GM20" at 18.016,-75.771 h5
M21 Heatsink:
  text ".LAYER_NAME" at -39.984,-75.771 h5
  text ".GM21" at 18.016,-75.771 h5
M22 Embedded Cavity:
  text ".LAYER_NAME" at -39.984,-75.771 h5
  text ".GM22" at 18.016,-75.771 h5
M23 Embedded Assembly:
  text ".LAYER_NAME" at -39.984,-75.771 h5
  text ".GM23" at 18.016,-75.771 h5
M24 Embedded Keepout:
  text ".LAYER_NAME" at -39.984,-75.771 h5
  text ".GM24" at 18.016,-75.771 h5
M25 Embedded Copper:
  text ".LAYER_NAME" at -39.984,-75.771 h5
  text ".GM25" at 18.016,-75.771 h5
M26 Embedded Copper:
  text ".LAYER_NAME" at -39.984,-75.771 h5
  text ".GM26" at 18.016,-75.771 h5
M27 Laser Cut:
  text ".LAYER_NAME" at -39.984,-75.771 h5
  text ".GM27" at 18.016,-75.771 h5
M28 Counterbore:
  text ".LAYER_NAME" at -39.984,-75.771 h5
  text ".GM28" at 18.016,-75.771 h5
M29 Countersink:
  text ".BoardName" at 119.349,20.541 h1.02 r270
  text ".BoardVersion" at 119.18,8.788 h1.02 r270
  text ".LAYER_NAME" at -39.984,-75.771 h5
  text ".GM29" at 18.016,-75.771 h5
M30:
  text ".LAYER_NAME" at -39.984,-75.771 h5
  text ".GM30" at 18.016,-75.771 h5
M31 Depth Milling:
  text ".LAYER_NAME" at -39.984,-75.771 h5
  text ".GM31" at 18.016,-75.771 h5
Route Tool Path:
  text ".LAYER_NAME" at -39.984,-75.771 h5
  text ".GM32" at 18.016,-75.771 h5

## Dimensions
40.266,-75.707 to 90.266,-75.707 on M16 Sheet
90.266,-75.707 to 90.266,-65.707 on M16 Sheet
49.53,-5.08 to -1.264,22.86 on M2 Board Dimensions
49.53,-5.08 to -1.264,22.86 on M2 Board Dimensions